# Allegro board Footprint.brd
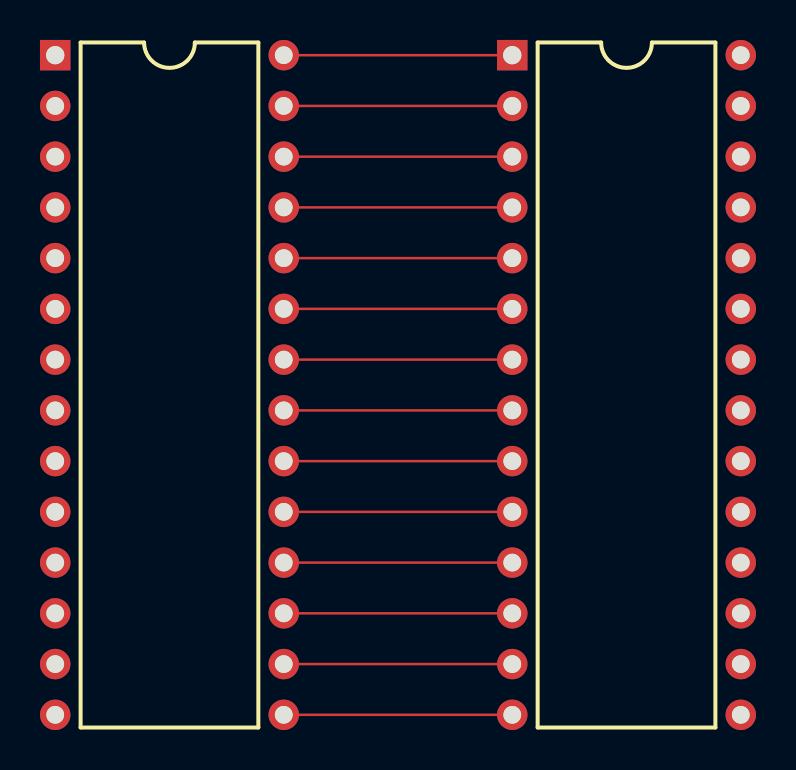
[diagram p0: board, top side]
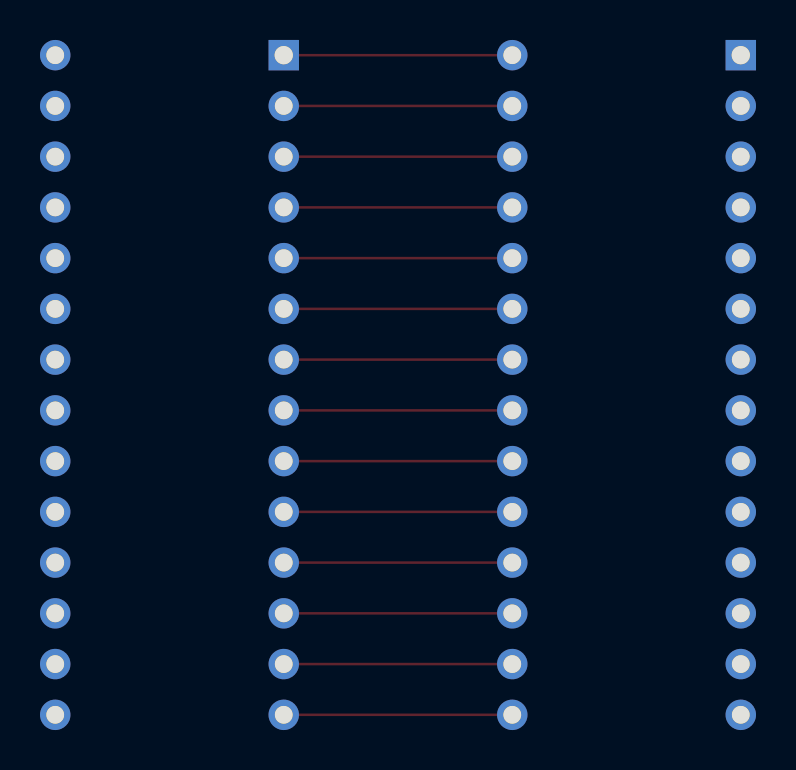
[diagram p1: board, bottom side, seen from below]

No outline. copper layers: TOP, BOTTOM. Coordinates in mm from the lowest, leftmost part position.

## Placement (name value [footprint] x y rotation side)
J3  DIPSOC-14x2_CAP  [MY_ATMEGA328]  0 0 0 top
J4  DIPSOC-14x2_CAP  [MY_ATMEGA328]  22.86 0 0 top

## Library data of the parts
J3 J4 = DIPSOC-14x2_CAP

## Footprints (pads in the part's own frame, mm; a bottom-side part is the same pattern mirrored in y, then rotated)
MY_ATMEGA328
  rect 1.524x1.524 hole 0.914: 1(7.62,4.445)
  round 1.524 hole 0.889: 2(7.62,1.905) 3(7.62,-0.635) 4(7.62,-3.175) 5(7.62,-5.715) 6(7.62,-8.255) 7(7.62,-10.795) 8(7.62,-13.335) 9(7.62,-15.875) 10(7.62,-18.415) 11(7.62,-20.955) 12(7.62,-23.495) 13(7.62,-26.035) 14(7.62,-28.575) 15(19.05,-28.575) 16(19.05,-26.035) 17(19.05,-23.495) 18(19.05,-20.955) 19(19.05,-18.415) 20(19.05,-15.875) 21(19.05,-13.335) 22(19.05,-10.795) 23(19.05,-8.255) 24(19.05,-5.715) 25(19.05,-3.175) 26(19.05,-0.635) 27(19.05,1.905) 28(19.05,4.445)

## Nets
N05533: J3.28 J4.1
N05535: J3.27 J4.2
N05537: J3.26 J4.3
N05539: J3.25 J4.4
N05541: J3.24 J4.5
N05543: J3.23 J4.6
N05545: J3.22 J4.7
N05547: J3.21 J4.8
N05549: J3.20 J4.9
N05551: J3.19 J4.10
N05553: J3.18 J4.11
N05555: J3.17 J4.12
N05557: J3.16 J4.13
N05559: J3.15 J4.14

Pads without a net: J3 1 2 3 4 5 6 7 8 9 10 11 12 13 14; J4 15 16 17 18 19 20 21 22 23 24 25 26 27 28

## Routing (per net, layer and track width the routed paths; a pad name or vN(x,y) marks a point on that pad's centre or on a via; arc(x,y) is an arc through that point)
N05533: length 11.4
  TOP w0.127: 30.48,4.44 19.05,4.44
N05535: length 11.4
  TOP w0.127: 19.05,1.9 30.48,1.9
N05537: length 11.4
  TOP w0.127: J4.3 J3.26
N05539: length 11.4
  TOP w0.127: J4.4 J3.25
N05541: length 11.4
  TOP w0.127: J4.5 J3.24
N05543: length 11.4
  TOP w0.127: 30.48,-8.26 19.05,-8.26
N05545: length 11.4
  TOP w0.127: 30.48,-10.8 19.05,-10.8
N05547: length 11.4
  TOP w0.127: J4.8 J3.21
N05549: length 11.4
  TOP w0.127: 30.48,-15.88 19.05,-15.88
N05551: length 11.4
  TOP w0.127: 30.48,-18.41 19.05,-18.41
N05553: length 11.4
  TOP w0.127: 30.48,-20.96 19.05,-20.96
N05555: length 11.4
  TOP w0.127: J4.12 J3.17
N05557: length 11.4
  TOP w0.127: 30.48,-26.04 19.05,-26.04
N05559: length 11.4
  TOP w0.127: 30.48,-28.58 19.05,-28.58
